# Altium PCB PCB2.PcbDoc 3....PcbDoc
Units mil, origin at the board's own origin, x right, y up, seen from the top; angles counter-clockwise.
Board outline 6000 x 4000 mil, 2 copper layers (Top Layer, Bottom Layer); 5 components, 3 nets, 15 pads, 0 vias.
Unrouted connection lines stored in the file: 8.
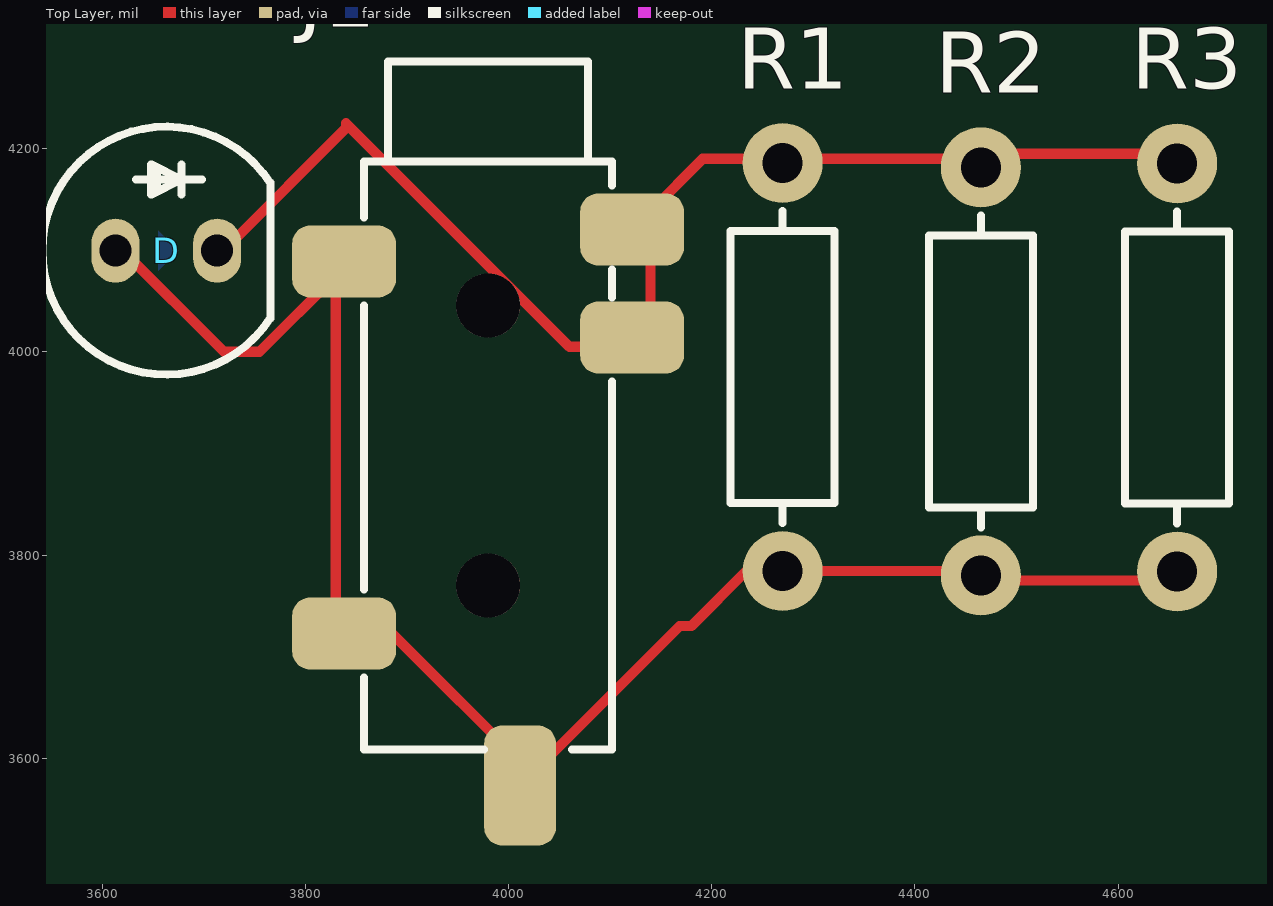
[diagram p0: Top Layer view]
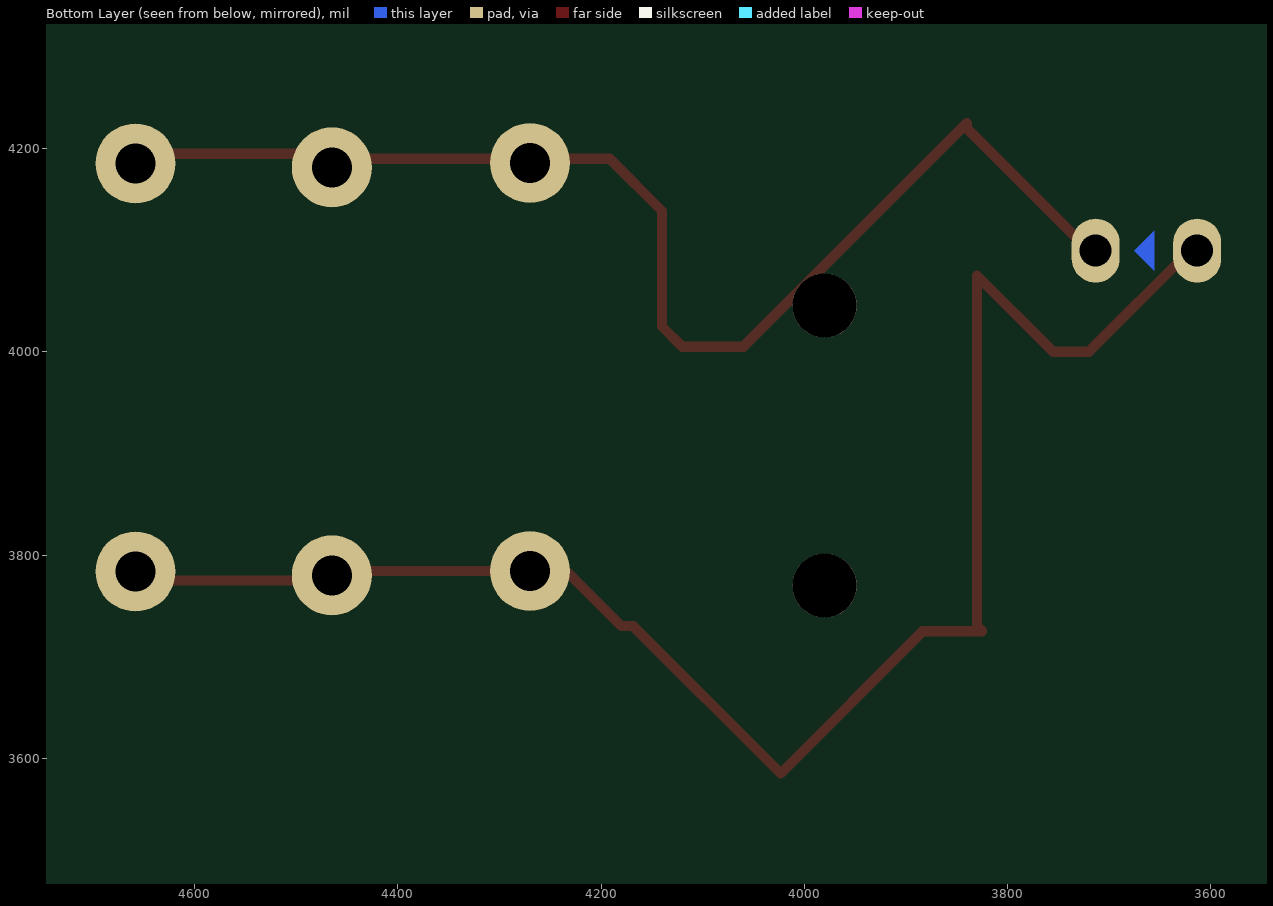
[diagram p1: Bottom Layer view, seen from below]

## Layer stack, top to bottom
Top Solder: solder mask 0.4, Solder Resist, Dk 3.5
Top Layer: signal copper 1.4
Dielectric 1: dielectric 12.6, FR-4, Dk 4.8
Bottom Layer: signal copper 1.4
Bottom Solder: solder mask 0.4, Solder Resist, Dk 3.5

## Board outline
1000,1000 7000,1000 7000,5000 1000,5000

## Design rules (kind name [scope] priority, off if disabled: settings)
Clearance [All] p1: gap=10 ignorepadtopadclearanceinfootprint=FALSE except(0: Arc-Hole Track-Hole SMDPad-Hole THPad-Hole Via-Hole Fill-Hole Poly-Hole Region-Hole Text-Hole)
PolygonConnect [All] p1: connectstyle=Relief reliefconductorwidth=10 reliefentries=4 polygonreliefangle="90 Angle" airgapwidth=10
RoomDefinition Sheet2 [InComponentClass('Sheet2')] p1: confinementstyle=ConfineIn formatcopy=TRUE lockcomponents=FALSE outline 3528.27,3444.61 4728.27,3444.61 4728.27,4334.61 3528.27,4334.61
RoutingVias [All] p1: holewidth=28 width=50 viastyle="Through Hole" minholewidth=28 minwidth=50 maxholewidth=28 maxwidth=50
SolderMaskExpansion [All] p1: expansion=4 istentingtop=FALSE
Width [All] p1: maxlimit=10 minlimit=10 preferedwidth=10
30 further rules are at their usual default settings.

## Classes and differential pairs
component class Sheet2: D J1 R1 R3

## Components (designator, comment, footprint, x,y, rotation, side; value= is the part's Value field where it differs from the comment)
D "LED5MM_RED" LED5MM_RED 3663.27,4099.61 r0 top
J1 "AudioJack" JCKAS_STX3500 3980,3770 r0 top
R1 "10K" R025W_AX04 4270,3985 r90 top
R2 "10K" R025W_AX04 4465,3980.79 r90 top
R3 "10K" R025W_AX04 4658.27,3984.61 r90 top

## Footprints (in the part's own frame and the unit in brackets; to place one, negate y for a bottom-side part, rotate by r counter-clockwise, add the part's x,y. Pads: shape width x height; smd on the part's side, far side on the other; paste and mask are expansions set on the pad)
JCKAS_STX3500 [mm] "Jack, Audio, Stereo, 3.5mm, RA, SMD"
  rrect50% 2.6x1.8 smd: 1(-3.6,8.1) 2(-3.6,-1.2) 3(3.6,6.2) 5(3.6,8.9)
  rrect50% 1.8x3 smd: 4(0.8,-5)
  round 1.6 hole 1.6 unplated: ""(0,0) ""(0,7)
  silkscreen extent -3.1,-4.1 3.1,13.1, body extent -4.5,-6 4.5,13, height 5
LED5MM_RED [mm] "LED THD 5MM RED"
  oval 1.2x1.6 hole 0.8: 1(-1.27,0) 2(1.27,0)
  Bottom Layer region: -0.2,0.5 -0.2,-0.5 0.3,0
  silkscreen extent -3.1,-3.1 2.6,3.1, body extent -3,-3 2.5,3, height 9.14
R025W_AX04 [mm] "RESISTOR 1/4 WATT, AXIAL0.4"
  round 2 hole 1: 1(-5.1,0) 2(5.1,0)
  silkscreen extent -3.9,-1.3 3.9,1.3, body extent -5.38,-1.28 5.38,1.28, height 2.6

## Part data
D: library part LED_THD_5MM_RED, "LED, THD, 5MM, RED", ASSEMBLY=ASSEMBLY, DESC=DESCRIPTION, MANF=MANF, MANF_P#=MANF_PART#, PARAM2=2.2V, PRICE=PRICE
J1: library part JACKA3.5SMD_STX-3500-3, "Jack, Audio, Stereo, 3.5mm, RA, SMD", ASSEMBLY=ASSEMBLY, DESC=DESCRIPTION, DIST#=MOUSER, MANF=Kycon, MANF_P#=STX-3500-3NTR, PARAM=PARAM, PRICE=1.6$
R1 R2 R3: library part RES_THD, "RESISTOR, THD", ASSEMBLY=ASSEMBLY, DESC=DESCRIPTION, DIST#=MOUSER, MANF="KOA SPEER", MANF_P#=RK73H1ETTP4701F, PARAM=0.063W, PARAM2=1%, PRICE="100= 0.5$"

## Nets (pads, with @x,y where several pads share a name; then routed paths per layer and width w, separated by ;. In a path a pad name is that pad's centre, name@x,y a point inside that pad or via, vN(x,y) a via of type N, cw(c..) or ccw(c..) an arc to the next point about the centre after c; other vN are vias at no path point)
GND: D.2 J1.3
NetD_1: D.1 R1.2 R2.2 R3.2
VCC: J1.1 J1.2 R1.1 R2.1 R3.1
pads on no net: J1. J1.4 J1.5
copper on no net: | length 2842.4
  Top Layer w10: 3620.39,4099.61 3720,4000 3755,4000 3830,4075 3830,3730 3825,3725 3883.35,3725 4023.35,3585 4168.35,3730 4180,3730 4234.21,3784.21 4485.79,3784.21 4495,3775 4665,3775 ; 3725,4105 3840,4220 3840,4225 4060,4005 4120,4005 4140,4025 4140,4138.66 4191.34,4190 4460,4190 4465,4195 4660,4195